# EAGLE board project (EAGLE 7.4.0)
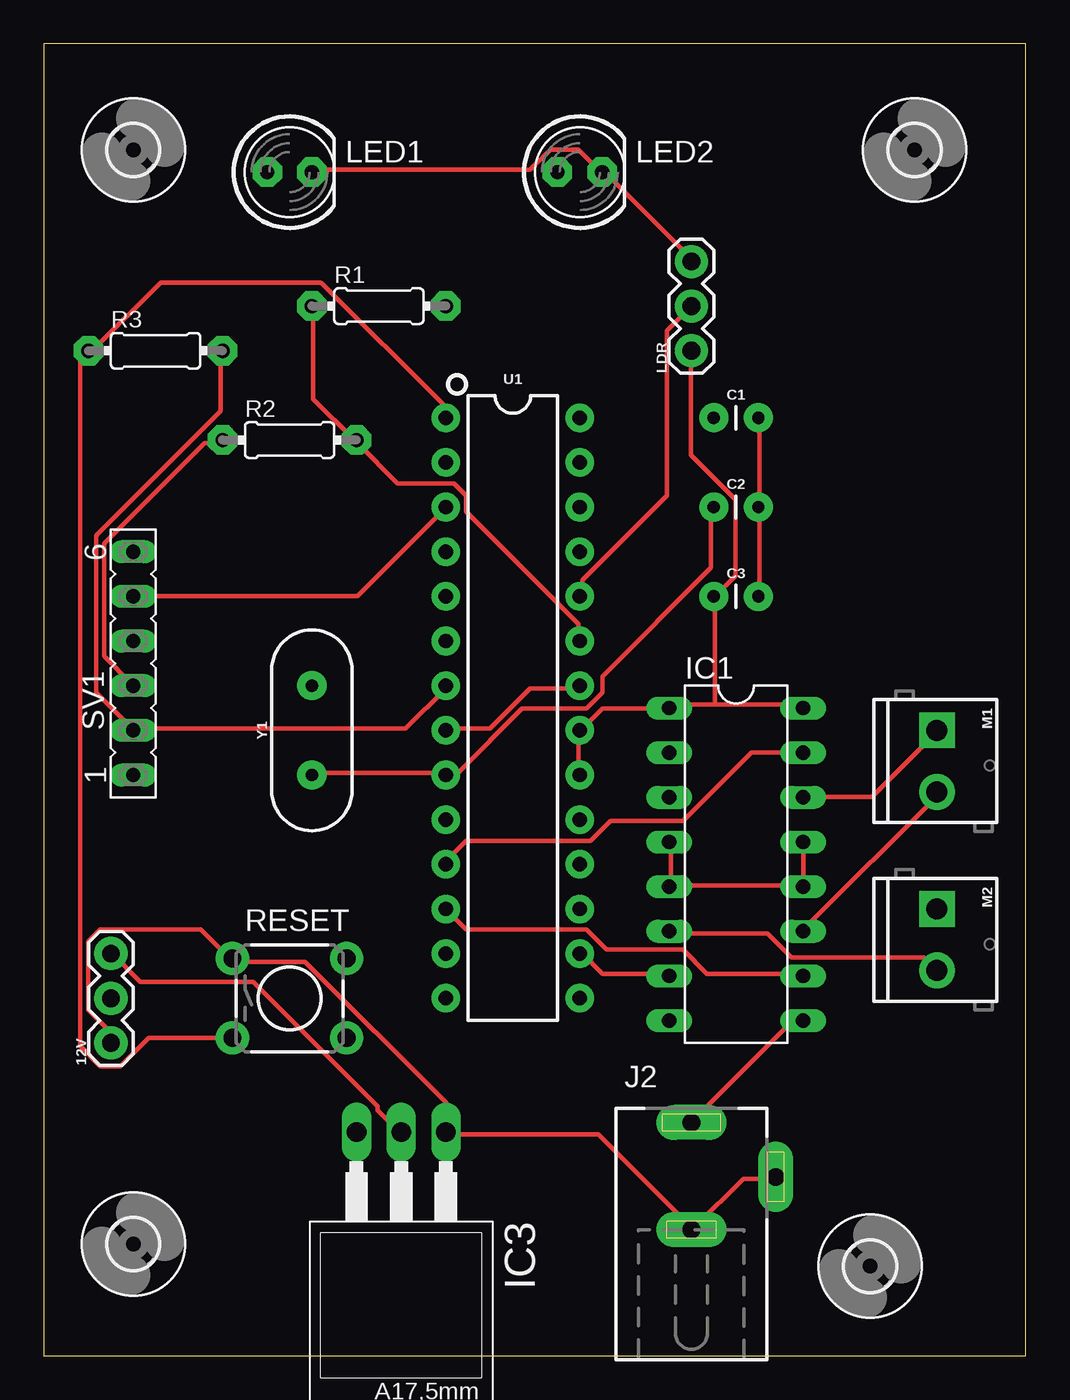
[diagram p0: board, top side]
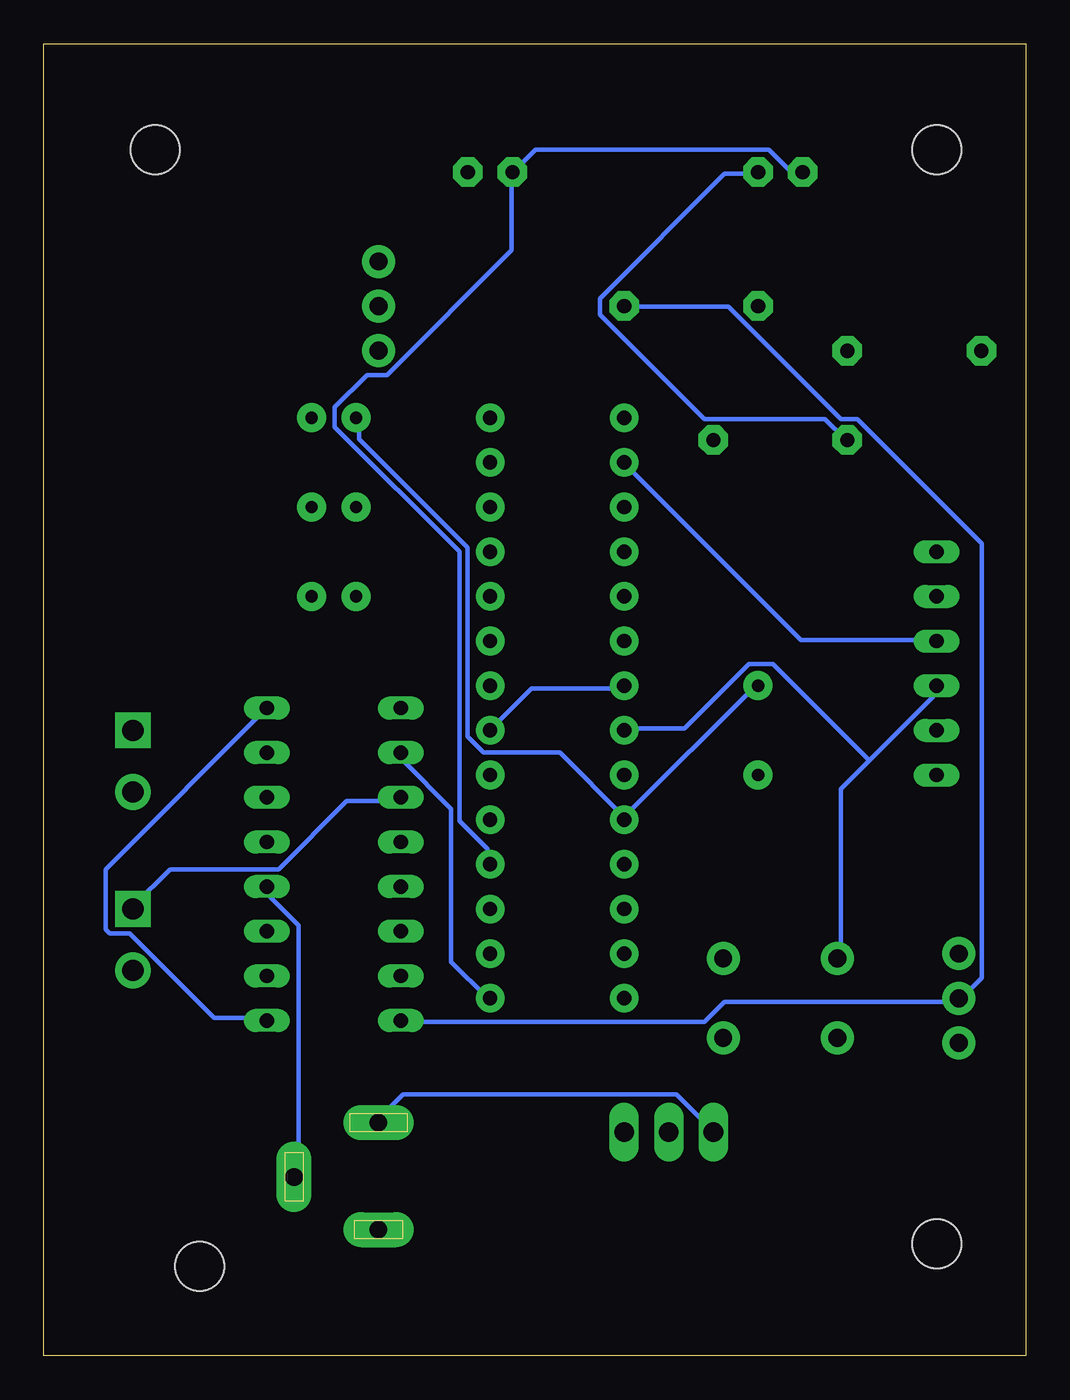
[diagram p1: board, bottom side, seen from below]

Size 55.86 x 74.6 mm. Coordinates in mm from the lower left corner, seen from the top.
Outline: 0,0 55.86,0 55.86,74.6 0,74.6 0,0
Copper layers (1*16): Top 0.035mm / dielectric 1.5mm / Bottom 0.035mm
Design rules "default": minimum track width 10mil, minimum drill 24mil, track to track 8mil, track to pad 8mil, pad to pad 8mil, via to via 8mil, smd to smd 8mil, copper to edge 40mil, drill to drill 8mil, minimum pad ring 10mil, minimum via ring 8mil, stop-mask expansion 4mil, vias tented up to drill 0mil, thermal gap 10mil

## Footprints (pad centres in the part's own frame; a part is rotated, then mirrored left to right if it is on the bottom)
1X03 = drill 1.016 pad 1.88: 1 0,0; 2 2.54,0; 3 5.08,0
CAP-PTH-2.54 = drill 0.7 pad 1.651: 1 -1.27,0; 2 1.27,0
2,8 = hole 2.8: 0,0
DIL16 = drill 0.813 long: 1 -8.89,-3.81; 2 -6.35,-3.81; 3 -3.81,-3.81; 4 -1.27,-3.81; 5 1.27,-3.81; 6 3.81,-3.81; 7 6.35,-3.81; 8 8.89,-3.81; 9 8.89,3.81; 10 6.35,3.81; 11 3.81,3.81; 12 1.27,3.81; 13 -1.27,3.81; 14 -3.81,3.81; 15 -6.35,3.81; 16 -8.89,3.81
TO220 = drill 1.118 long: 1 -2.54,-6.35; 2 0,-6.35; 3 2.54,-6.35
DCJ0202 = drill 1 pad 2 long: 1 0,3.1; 2 4.8,0; 3 0,-3
LED5MM = drill 0.813 pad 1.676 octagon: A -1.27,0; K 1.27,0
SCREWTERMINAL-3.5MM-2 = drill 1.2 pad 2.032 square: 1 0,0 | drill 1.2 pad 2.032: 2 3.5,0
0204/7 = drill 0.813 pad 1.676 octagon: 1 -3.81,0; 2 3.81,0
TACTILE-PTH = drill 1.016 pad 1.88: 1 -3.251,2.261; 2 3.251,2.261; 3 -3.251,-2.261; 4 3.251,-2.261
FE06 = drill 0.813 long: 1 -6.35,0; 2 -3.81,0; 3 -1.27,0; 4 1.27,0; 5 3.81,0; 6 6.35,0
DIP28 = drill 0.813 pad 1.626: 1 -16.51,-3.81; 2 -13.97,-3.81; 3 -11.43,-3.81; 4 -8.89,-3.81; 5 -6.35,-3.81; 6 -3.81,-3.81; 7 -1.27,-3.81; 8 1.27,-3.81; 9 3.81,-3.81; 10 6.35,-3.81; 11 8.89,-3.81; 12 11.43,-3.81; 13 13.97,-3.81; 14 16.51,-3.81; 15 16.51,3.81; 16 13.97,3.81; 17 11.43,3.81; 18 8.89,3.81; 19 6.35,3.81; 20 3.81,3.81; 21 1.27,3.81; 22 -1.27,3.81; 23 -3.81,3.81; 24 -6.35,3.81; 25 -8.89,3.81; 26 -11.43,3.81; 27 -13.97,3.81; 28 -16.51,3.81
HC49US = drill 0.7 pad 1.651: 1 -2.54,0; 2 2.54,0

## Placement (x,y rotation side)
12V  [1X03]  3.81,17.78 90 top
C1  22pF  [CAP-PTH-2.54]  39.37,53.34 0 top
C2  22pF  [CAP-PTH-2.54]  39.37,48.26 0 top
C3  104  [CAP-PTH-2.54]  39.37,43.18 0 top
H1  MOUNT-HOLE2.8  [2,8]  5.08,6.35 0 top
H2  MOUNT-HOLE2.8  [2,8]  5.08,68.58 0 top
H3  MOUNT-HOLE2.8  [2,8]  49.53,68.58 0 top
H4  MOUNT-HOLE2.8  [2,8]  46.99,5.08 0 top
IC1  L293D  [DIL16]  39.37,27.94 270 top
IC3  LM1117T-3.3  [TO220]  20.32,6.35 180 top
J2  DCJ0202  [DCJ0202]  36.83,10.16 0 top
LDR  [1X03]  36.83,57.15 90 top
LED1  [LED5MM]  13.97,67.31 0 top
LED2  [LED5MM]  30.48,67.31 0 top
M1  [SCREWTERMINAL-3.5MM-2]  50.8,35.56 270 top
M2  [SCREWTERMINAL-3.5MM-2]  50.8,25.4 270 top
R1  [0204/7]  19.05,59.69 0 top
R2  [0204/7]  13.97,52.07 0 top
R3  [0204/7]  6.35,57.15 0 top
RESET  [TACTILE-PTH]  13.97,20.32 0 top
SV1  [FE06]  5.08,39.37 90 top
U1  328P  [DIP28]  26.67,36.83 270 top
Y1  [HC49US]  15.24,35.56 90 top

## Library data of the parts
12V LDR = SparkFun-Connectors
C1-C3 = SparkFun-Capacitors; PROD_ID: CAP-09128
H1-H4 = holes
IC1 = st-microelectronics; MPN: L293D; OC_FARNELL: 9589619; OC_NEWARK: 56P8249
IC3 = lm1117
J2 = con-jack; OC_FARNELL: unknown; OC_NEWARK: unknown
LED1 LED2 R1-R3 = adafruit
M1 M2 = SparkFun-Retired; PROD_ID: CONN-08399
RESET = SparkFun-Retired
SV1 = con-lsta; OC_FARNELL: unknown; OC_NEWARK: unknown
U1 = SparkFun-IC-Microcontroller; PROD_ID: IC-09136
Y1 = SparkFun-Clocks

## Nets
3.3: 12V.3 IC3.2
12VIN: 12V.2 IC1.8 R1.2
A0: R1.1 R2.2 U1.23
ENB: SV1.1
GND: 12V.1 IC1.4 IC1.5 IC1.12 IC1.13 IC3.1 J2.2 J2.3 LDR.3 LED1.K LED2.K R2.1 RESET.1 SV1.3 U1.8 U1.22
L+: LED1.A LED2.A U1.18
LDR: LDR.2 U1.24
M1-1: IC1.15 U1.11
M01-1: IC1.14 M1.1
M1-2: IC1.10 U1.12
M01-2: IC1.11 M1.2
M02-1: IC1.3 M2.1
M2-1: IC1.2 U1.15
M02-2: IC1.6 M2.2
M2-2: IC1.7 U1.16
N$1: C2.1 U1.9 Y1.1
N$2: C1.1 U1.10 Y1.2
N$4: C1.2 C2.2 C3.2
N$5: R3.1 RESET.3 U1.1
RX: SV1.5 U1.3
STATE: SV1.6
TX: SV1.4 U1.2
VCC: C3.1 IC1.1 IC1.9 IC1.16 IC3.3 J2.1 LDR.1 R3.2 SV1.2 U1.7 U1.20 U1.21

## Tracks (layer width: path | path; a pad name or v marks a point on that pad's centre or on a via)
3.3
  Top 0.254: IC3.2 20.12,12.8 18.97,13.95 18.97,14.17 11.89,21.26 5.49,21.26 3.89,22.86 12V.3
12VIN
  Bottom 0.254: IC1.8 35.43,18.97 18.29,18.97 17.14,20.12 3.89,20.12 12V.2 3.66,20.34 2.52,21.49 2.52,46.18 9.6,53.26 10.52,53.26 16.92,59.66 22.86,59.66 R1.2
A0
  Top 0.254: U1.23 30.4,40.69 30.4,41.6 24,48.01 24,48.92 23.32,49.61 20.12,49.61 17.83,51.89 R2.2 17.6,52.12 15.32,54.41 15.32,59.66 R1.1
GND
  Top 0.254: 35.66,26.75 35.66,29.03 IC1.4 | IC1.13 43.2,29.03 43.2,26.75 IC1.12 42.98,26.75 35.66,26.75 | 35.66,26.75 IC1.5 | J2.2 41.6,10.06 39.78,10.06 37.03,7.32 J2.3 36.8,7.32 31.55,12.57 22.86,12.57 IC3.1 22.86,14.4 14.86,22.4 10.74,22.4 RESET.1 10.52,22.63 8.91,24.23 3.2,24.23 2.52,23.55 2.52,19.66 3.66,18.52 3.66,17.83 12V.1 | LED1.K 15.32,67.44 27.66,67.44 28.8,68.58 30.4,68.58 31.55,67.44 LED2.K 31.77,67.44 36.8,62.41 LDR.3 | U1.8 22.86,35.66 25.38,35.66 27.66,37.95 30.4,37.95 U1.22 | R2.1 10.06,51.89 9.14,51.89 3.43,46.18 3.43,39.78 5.03,38.18 SV1.3
  Bottom 0.254: IC1.12 42.98,26.52 42.98,26.06 41.38,24.46 41.38,10.52 41.6,10.29 J2.2 | 8.91,33.83 10.52,32.23 10.52,22.63 RESET.1 | 8.91,33.83 5.26,37.49 5.26,37.95 SV1.3 | 8.91,33.83 14.4,39.32 15.77,39.32 19.43,35.66 22.86,35.66 U1.8 | LED1.K 15.32,67.21 17.14,67.21 24.23,60.12 24.23,59.21 18.29,53.26 11.43,53.26 10.29,52.12 R2.1
L+
  Bottom 0.254: U1.18 30.63,28.12 30.63,28.8 32.23,30.4 32.23,45.72 39.32,52.81 39.32,53.95 37.49,55.78 36.35,55.78 29.26,62.87 29.26,67.21 LED2.A 29.03,67.44 27.89,68.58 14.63,68.58 13.49,67.44 12.8,67.44 LED1.A
LDR
  Top 0.254: LDR.2 35.43,58.29 35.43,48.92 30.63,44.12 30.63,43.2 U1.24
M1-1
  Top 0.254: IC1.15 40.23,34.29 36.35,30.4 32.23,30.4 31.09,29.26 24,29.26 22.86,28.12 U1.11
M01-1
  Top 0.254: IC1.14 43.2,31.77 47.09,31.77 50.75,35.43 M1.1
M1-2
  Top 0.254: IC1.10 42.98,21.72 37.72,21.72 36.35,23.09 32,23.09 30.86,24.23 24,24.23 22.86,25.38 U1.12
M01-2
  Top 0.254: IC1.11 43.2,24.23 50.98,32 M1.2
M02-1
  Bottom 0.254: IC1.3 35.66,31.55 38.63,31.55 42.52,27.66 48.69,27.66 50.75,25.6 M2.1
M2-1
  Bottom 0.254: IC1.2 35.43,34.29 35.43,33.83 32.69,31.09 32.69,22.4 30.63,20.34 U1.15
M02-2
  Top 0.254: IC1.6 35.66,24 41.15,24 42.52,22.63 50.06,22.63 50.75,21.95 M2.2
M2-2
  Top 0.254: IC1.7 35.43,21.72 31.77,21.72 30.63,22.86 U1.16
N$1
  Top 0.254: 22.86,33.15 15.32,33.15 Y1.1 | 22.86,33.15 23.55,33.15 27.2,36.8 30.86,36.8 31.77,37.72 31.77,38.63 37.95,44.81 37.95,48.23 C2.1 | 22.86,33.15 U1.9
N$2
  Bottom 0.254: 22.86,30.63 15.32,38.18 Y1.2 | 22.86,30.63 26.52,34.29 30.86,34.29 31.77,35.2 31.77,45.95 37.95,52.12 37.95,53.26 C1.1 | 22.86,30.63 U1.10
N$4
  Top 0.254: C3.2 40.69,43.2 40.69,48.23 C2.2 40.69,48.46 40.69,53.26 C1.2
N$5
  Top 0.254: U1.1 22.86,53.95 15.77,61.04 6.63,61.04 2.74,57.15 R3.1 2.52,57.15 2.06,56.69 2.06,17.6 3.2,16.46 4.34,16.46 5.94,18.06 RESET.3
RX
  Top 0.254: SV1.5 5.26,43.2 17.83,43.2 22.86,48.23 U1.3
TX
  Bottom 0.254: SV1.4 5.26,40.69 12.8,40.69 22.86,50.75 U1.2
VCC
  Top 0.254: U1.7 22.86,37.95 20.57,35.66 5.26,35.66 SV1.2 5.03,35.66 2.97,37.72 2.97,46.63 10.06,53.72 10.06,57.15 R3.2 | IC1.9 42.98,18.97 42.52,18.97 37.03,13.49 J2.1 | 38.18,37.03 35.66,37.03 IC1.1 35.43,36.8 31.77,36.8 30.63,35.66 U1.21 30.4,35.43 30.4,33.15 U1.20 | 38.18,37.03 42.98,37.03 IC1.16 | 38.18,37.03 38.18,42.98 C3.1 38.18,43.2 39.32,44.35 39.32,48.69 36.8,51.21 36.8,57.15 LDR.1
  Bottom 0.254: IC3.3 17.83,12.8 19.89,14.86 35.43,14.86 36.8,13.49 J2.1 | IC1.16 52.35,27.66 52.35,24.23 52.12,24 50.98,24 46.18,19.2 43.2,19.2 IC1.9 | U1.7 22.86,37.95 28.12,37.95 30.4,35.66 U1.21